# Altium PCB V1.PcbDoc
Units mm, origin at the board's own origin, x right, y up, seen from the top; angles counter-clockwise.
Board outline 147.73 x 85.2 mm, 2 copper layers (Top Layer, Bottom Layer); 129 components, 191 nets, 593 pads, 94 vias.
Unrouted connection lines stored in the file: 2.
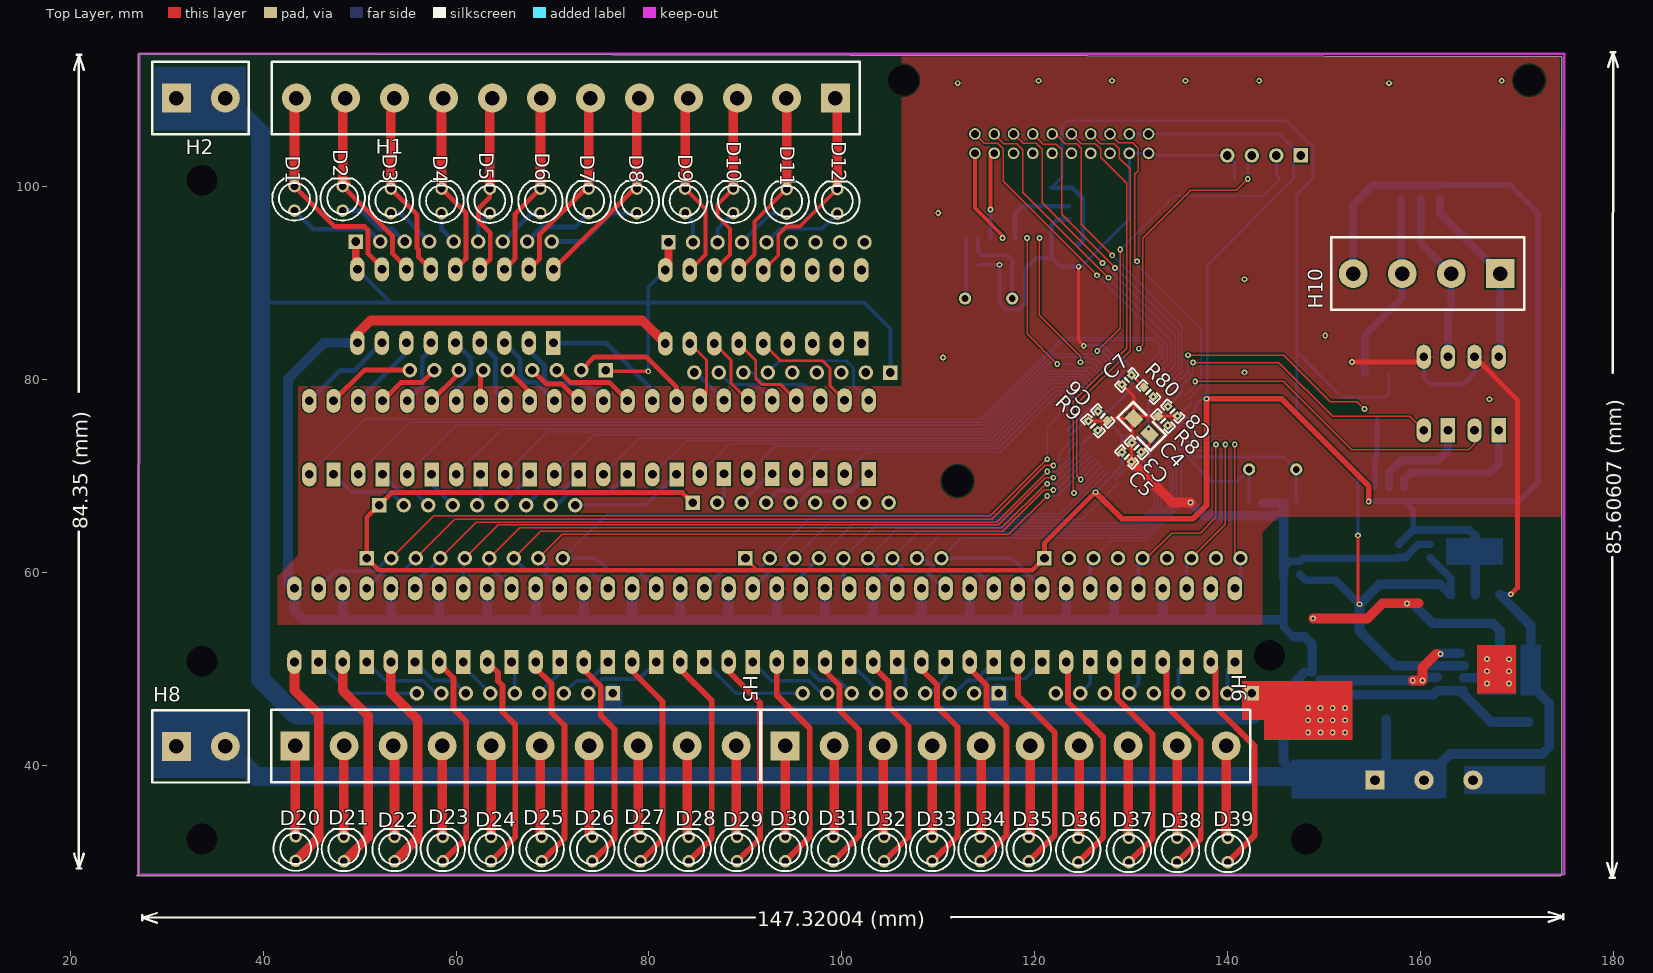
[diagram p0: Top Layer view]
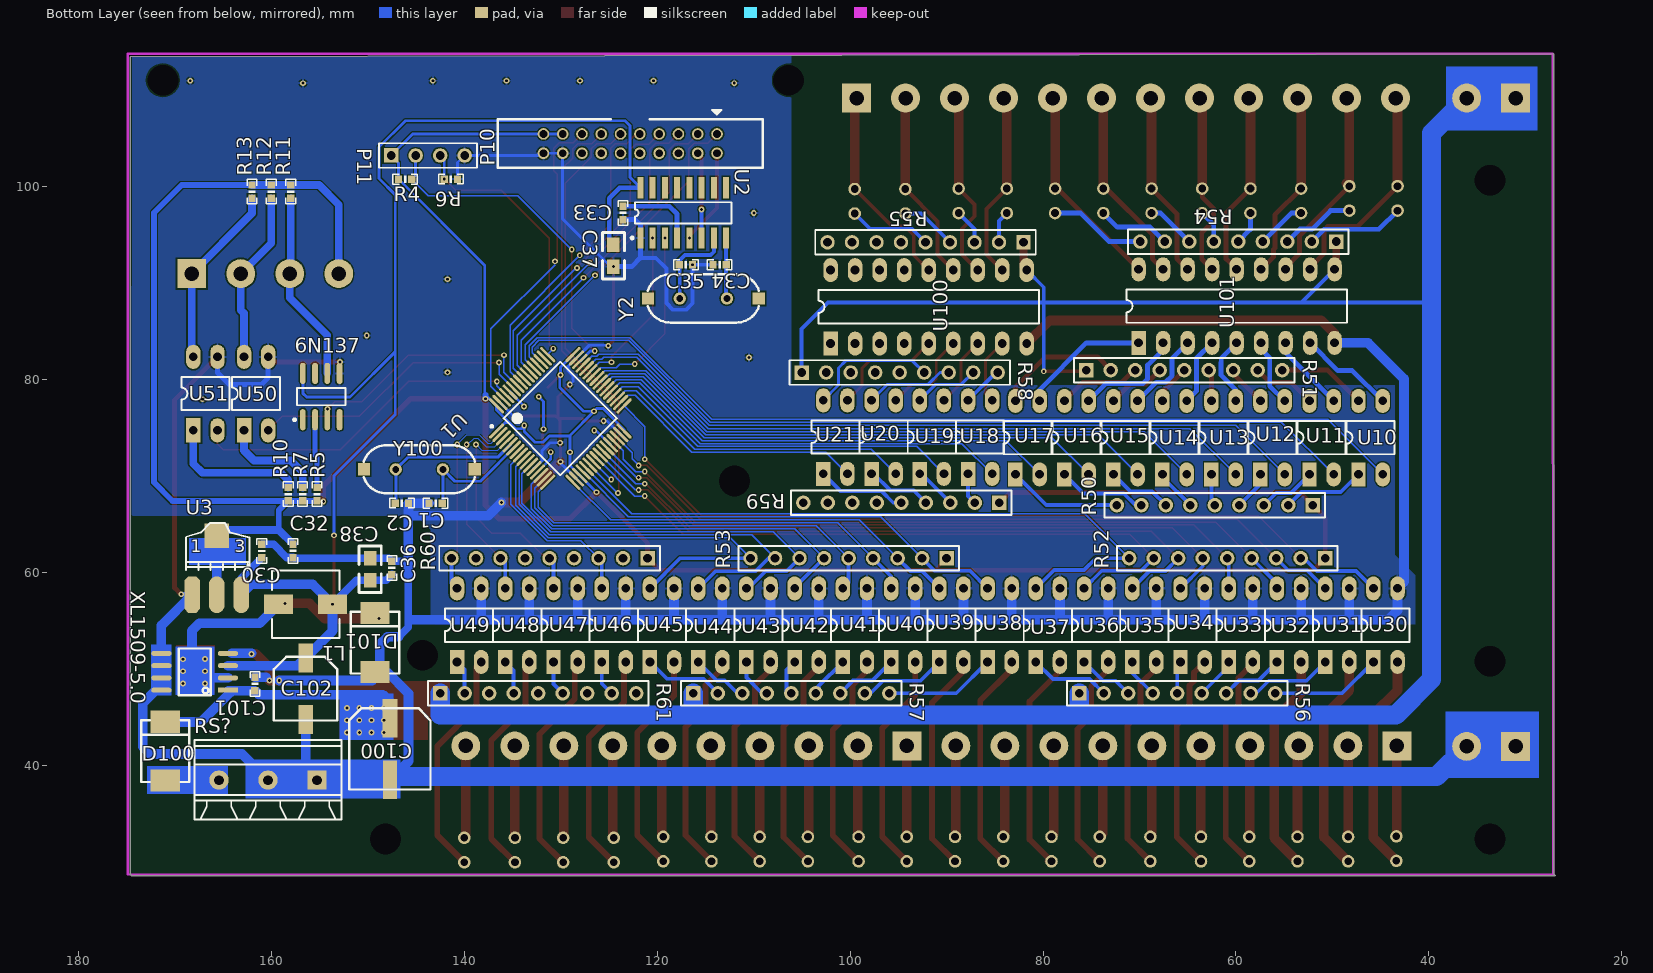
[diagram p1: Bottom Layer view, seen from below]

## Layer stack, top to bottom
Top Layer: signal copper 0.0356
Dielectric: dielectric 0.32, FR-4, Dk 4.8
Bottom Layer: signal copper 0.0356

## Board outline
27.05,113.8 27.05,28.75 26.9,28.6 174.5,28.6 174.625,28.725 174.625,113.5

## Design rules (kind name [scope] priority, off if disabled: settings)
Clearance [All] p1: gap=0.15
PolygonConnect [All] p1: connectstyle=Relief reliefconductorwidth=0.254 reliefentries=4 polygonreliefangle="90 Angle"
RoutingVias [All] p1: holewidth=0.711 width=1.27 viastyle="Through Hole" minholewidth=0.711 minwidth=1.27 maxholewidth=0.711 maxwidth=1.27
SilkscreenOverComponentPads [All] p1: minsilkscreentomaskgap=0.254
SolderMaskExpansion [All] p1: expansion=0.102
Width [All] p1: maxlimit=10 minlimit=0.15 preferedwidth=0.15
27 further rules are at their usual default settings.

## Classes and differential pairs
component class 控制板: C1 C2 C3 C4 C5 C6 C7 C8 C30 C32 C33 C34 C35 C36 C37 C38 C100 C101 C102 D1 D2 D3 D4 D5 D6 D7 D8 D9 D10 D11 D12 D20 D21 D22 D23 D24 D25 D26 D27 D28 D29 D30 D31 D32 D33 D34 D35 D36 D37 D38 D39 D100 D101 H1 H2 H5 H6 H8 H10 L1 P10 P11 R4 R6 R8 R9 R50 R51 R52 R53 R54 R55 R56 R57 R58 R59 R60 R61 R80 RS? U1 U2 U3 U10 U11 U12 U13 U14 U15 U16 U17 U18 U19 U20 U21 U30 U31 U32 U33 U34 U35 U36 U37 U38 U39 U40 U41 U42 U43 U44 U45 U46 U47 U48 U49 U100 U101 XL1509-5.0 Y2 Y100

## Components (designator, comment, footprint, x,y, rotation, side; value= is the part's Value field where it differs from the comment)
6N137 "Comment" SOIC8_N 154.832,78.26 r90 bottom
C1 "22" 0603P 142.966,67.214 r180 bottom
C2 "22" 0603P 146.466,67.214 r0 bottom
C3 "104" 0603P 130.541,72.989 r315 top
C4 "10uF" 0805 130.291,75.989 r315 top
C5 "104" 0603P 129.541,71.989 r135 top
C6 "104" 0603P 127.041,76.239 r135 top
C7 "104" 0603P 129.541,79.989 r45 top
C8 "104" 0603P 133.291,75.739 r315 top
C30 "104" 0603P 161,62.25 r270 bottom
C32 "104" 0603P 157.75,62.25 r90 bottom
C33 "104" 0603P 123.55,97.3 r270 bottom
C34 "22" 0603P 113.525,91.925 r180 bottom
C35 "22" 0603P 117.025,91.925 r0 bottom
C36 "104" 0603P 147.5,60.5 r270 bottom
C37 "10uF" 0805 124.55,91.725 r90 bottom
C38 "10uF" 0805 149.75,61.5 r270 bottom
C100 "Cap Pol1" C-8.4X8.4MM 147.7,41.725 r270 bottom
C101 "104" 0603P 161.7,48.475 r270 bottom
C102 "Cap Pol1" C-6.6X6.6MM 156.45,47.975 r270 bottom
D1 "LED0" LED_A2 43.25,98.8 r270 top
D2 "LED0" LED_A2 48.25,98.8 r270 top
D3 "LED0" LED_A2 53.25,98.55 r270 top
D4 "LED0" LED_A2 58.5,98.55 r270 top
D5 "LED0" LED_A2 63.5,98.55 r270 top
D6 "LED0" LED_A2 68.75,98.55 r270 top
D7 "LED0" LED_A2 73.75,98.55 r270 top
D8 "LED0" LED_A2 78.75,98.55 r270 top
D9 "LED0" LED_A2 83.75,98.55 r270 top
D10 "LED0" LED_A2 88.75,98.55 r270 top
D11 "LED0" LED_A2 94.275,98.5 r270 top
D12 "LED0" LED_A2 99.525,98.5 r270 top
D20 "LED0" LED_A2 43.375,31.4 r270 top
D21 "LED0" LED_A2 48.375,31.35 r270 top
D22 "LED0" LED_A2 53.625,31.35 r270 top
D23 "LED0" LED_A2 58.625,31.35 r270 top
D24 "LED0" LED_A2 63.625,31.35 r270 top
D25 "LED0" LED_A2 68.875,31.35 r270 top
D26 "LED0" LED_A2 74.125,31.35 r270 top
D27 "LED0" LED_A2 79.125,31.35 r270 top
D28 "LED0" LED_A2 84.125,31.35 r270 top
D29 "LED0" LED_A2 89.125,31.35 r270 top
D30 "LED0" LED_A2 94.125,31.35 r270 top
D31 "LED0" LED_A2 99.125,31.35 r270 top
D32 "LED0" LED_A2 104.375,31.35 r270 top
D33 "LED0" LED_A2 109.375,31.35 r270 top
D34 "LED0" LED_A2 114.375,31.35 r270 top
D35 "LED0" LED_A2 119.375,31.35 r270 top
D36 "LED0" LED_A2 124.5,31.25 r270 top
D37 "LED0" LED_A2 129.75,31.25 r270 top
D38 "LED0" LED_A2 134.75,31.25 r270 top
D39 "LED0" LED_A2 140,31.25 r270 top
D100 "1N5822" 6032C-JL 171,41.5 r90 bottom
D101 "1N5822" 6032C-JL 149.25,52.75 r90 bottom
H1 "HEAD12" 5.08dip-12 101.275,109.2 r180 top
H2 "HEAD2" 5.08DIP-2 36,109.2 r0 top
H5 "HEAD10" 5.08dip-10 41.383,42.046 r0 top
H6 "HEAD10" 5.08dip-10 92.183,42.046 r0 top
H8 "HEAD2" 5.08DIP-2 36,42 r0 top
H10 "PWM" 5.08dip-4 170.75,91 r180 top
L1 "Inductor Iron" L-SMT-7X7 156.45,56.725 r0 bottom
P10 "MHDR2X10" HDR10X2_B1_2.0 113.8,105.475 r0 bottom
P11 "Header 4" HDR1X4 147.58,103.25 r180 bottom
R4 "10KR" 0603P 146.13,100.8 r180 bottom
R5 "10KR" 0603P 155.258,68.138 r270 bottom (schematic designator R4)
R6 "10KR" 0603P 141.38,100.8 r0 bottom
R7 "10KR" 0603P 156.758,68.138 r270 bottom (schematic designator R4)
R8 "100K" 0603P 134.291,76.739 r135 top
R9 "100K" 0603P 126.041,75.239 r135 top
R10 "10KR" 0603P 158.258,68.138 r270 bottom (schematic designator R4)
R11 "10KR" 0603P 158,99.5 r270 bottom (schematic designator R4)
R12 "10KR" 0603P 160,99.5 r270 bottom (schematic designator R4)
R13 "10KR" 0603P 162,99.5 r270 bottom (schematic designator R4)
R50 "330" HDR1X9 52.025,67 r0 bottom
R51 "22K" HDR1X9 75.525,81 r180 bottom
R52 "Header 9" HDR1X9 50.75,61.5 r0 bottom
R53 "Header 9" HDR1X9 90,61.5 r0 bottom
R54 "4.7k" HDR1X9 49.6,94.325 r0 bottom
R55 "4.7k" HDR1X9 82.025,94.25 r0 bottom
R56 "4.7k" HDR1X9 76.25,47.5 r180 bottom
R57 "4.7k" HDR1X9 116.25,47.5 r180 bottom
R58 "22K" HDR1X9 105.025,80.75 r180 bottom
R59 "330" HDR1X9 84.525,67.25 r0 bottom
R60 "Header 9" HDR1X9 121,61.5 r0 bottom
R61 "4.7k" HDR1X9 142.5,47.5 r180 bottom
R80 "10R" 0603P 131.791,78.739 r315 top
RS? "Power 24V" MKDSN_3RMI 155.265,38.5 r0 bottom
U1 "STM32F103RBT6" LQFP64 130.041,75.989 r135 bottom
U2 "CH340G" SOP16M 117.3,97.3 r180 bottom
U3 "AMS1117-3.3" AMS1117 168.2,57.725 r180 bottom
U10 "Q817" DIP4 47.299,70.19 r90 bottom
U11 "Q817" DIP4 52.379,70.19 r90 bottom
U12 "Q817" DIP4 57.459,70.19 r90 bottom
U13 "Q817" DIP4 62.539,70.19 r90 bottom
U14 "Q817" DIP4 67.619,70.19 r90 bottom
U15 "Q817" DIP4 72.699,70.19 r90 bottom
U16 "Q817" DIP4 77.779,70.19 r90 bottom
U17 "Q817" DIP4 82.859,70.19 r90 bottom
U18 "Q817" DIP4 87.775,70.25 r90 bottom
U19 "Q817" DIP4 92.775,70.25 r90 bottom
U20 "Q817" DIP4 97.775,70.25 r90 bottom
U21 "Q817" DIP4 102.775,70.25 r90 bottom
U30 "Q817" DIP4 45.75,50.75 r90 bottom
U31 "Q817" DIP4 50.75,50.75 r90 bottom
U32 "Q817" DIP4 55.75,50.75 r90 bottom
U33 "Q817" DIP4 60.75,50.75 r90 bottom
U34 "Q817" DIP4 65.75,50.75 r90 bottom
U35 "Q817" DIP4 70.75,50.75 r90 bottom
U36 "Q817" DIP4 75.75,50.75 r90 bottom
U37 "Q817" DIP4 80.75,50.75 r90 bottom
U38 "Q817" DIP4 85.75,50.75 r90 bottom
U39 "Q817" DIP4 90.75,50.75 r90 bottom
U40 "Q817" DIP4 95.75,50.75 r90 bottom
U41 "Q817" DIP4 100.75,50.75 r90 bottom
U42 "Q817" DIP4 105.75,50.75 r90 bottom
U43 "Q817" DIP4 110.75,50.75 r90 bottom
U44 "Q817" DIP4 115.75,50.75 r90 bottom
U45 "Q817" DIP4 120.75,50.75 r90 bottom
U46 "Q817" DIP4 125.75,50.75 r90 bottom
U47 "Q817" DIP4 130.75,50.75 r90 bottom
U48 "Q817" DIP4 135.75,50.75 r90 bottom
U49 "Q817" DIP4 140.75,50.75 r90 bottom
U50 "Q817" DIP4 162.832,74.76 r90 bottom (schematic designator U42)
U51 "Q817" DIP4 168.082,74.76 r90 bottom (schematic designator U42)
U100 "ULN2803" DIP18 102.025,83.75 r90 bottom
U101 "ULN2803" DIP18 70.1,83.825 r90 bottom
XL1509-5.0 "Component_1" SO8N-W-JL 167.95,49.725 r90 bottom
Y2 "12MHz" XTAL_US 112.775,88.425 r0 bottom
Y100 "8MHz" XTAL_US 142.216,70.714 r0 bottom

## Footprints (in the part's own frame and the unit in brackets; to place one, negate y for a bottom-side part, rotate by r counter-clockwise, add the part's x,y. Pads: shape width x height; smd on the part's side, far side on the other; paste and mask are expansions set on the pad)
5.08DIP-2 [mm]
  rect 3x3 hole 1.5: 1(-5,0)
  round 3 hole 1.5: 2(0.08,0)
  silkscreen extent -7.5,-3.75 2.5,3.75
5.08dip-4 [mm]
  rect 3x3 hole 1.5: 1(2.5,0)
  round 3 hole 1.5: 2(7.58,0) 3(12.66,0) 4(17.74,0)
  silkscreen extent 0,-3.75 20,3.75
5.08dip-10 [mm]
  rect 3x3 hole 1.5: 1(1.94,0)
  round 3 hole 1.5: 2(7.02,0) 3(12.1,0) 4(17.18,0) 5(22.26,0) 6(27.34,0) 7(32.42,0) 8(37.5,0) 9(42.58,0) 10(47.66,0)
  silkscreen extent -0.56,-3.75 50.17,3.75
5.08dip-12 [mm]
  rect 3x3 hole 1.5: 1(1.94,0)
  round 3 hole 1.5: 2(7.02,0) 3(12.1,0) 4(17.18,0) 5(22.26,0) 6(27.34,0) 7(32.42,0) 8(37.5,0) 9(42.58,0) 10(47.66,0) 11(52.74,0) 12(57.82,0)
  silkscreen extent -0.56,-3.75 60.37,3.75
0603P [mil]
  rect 30x30 smd: 1(-27,0) 2(27.5,-0.06)
  silkscreen extent -50,-20 50,20
0805 [mil]
  rect 60x50 smd: 1(0,-0.06) 2(90,-0.06)
  silkscreen extent -50,-45 140,45
6032C-JL [mil]
  rect 90x120 smd: 1(120,0) 2(-120,0)
  silkscreen extent -126,-98 126,98
AMS1117 [mil]
  oct 65x150 smd: 1(0.03,-0.06)
  oval 65x150 smd: 2(100.03,-0.06) 3(200.03,-0.06)
  rect 100x100 smd: 4(100.03,239.94)
  silkscreen extent -26,100 234,293
C-6.6X6.6MM [mm]
  rect 3x1.5 smd: 1(-3.2,0) 2(3.2,0)
  silkscreen extent -3.3,-3.3 3.3,3.3
C-8.4X8.4MM [mm]
  rect 4x1.524 smd: 1(-3.2,0)
  rect 4x1.5 smd: 2(3.2,0)
  silkscreen extent -4.2,-4.2 4.2,4.2
DIP4 [mm]
  rect 2.5x1.5 hole 0.9: 1(0,0)
  oval 2.5x1.5 hole 0.9: 2(0,-2.5) 3(7.62,-2.5) 4(7.62,0)
  silkscreen extent 2.08,-3.75 5.54,1.25
DIP18 [mm]
  rect 2.5x1.5 hole 0.9: 1(0,0)
  oval 2.5x1.5 hole 0.9: 2(0,-2.54) 3(0,-5.08) 4(0,-7.62) 5(0,-10.16) 6(0,-12.7) 7(0,-15.24) 8(0,-17.78) 9(0,-20.32) 10(7.62,-20.32) 11(7.62,-17.78) 12(7.62,-15.24) 13(7.62,-12.7) 14(7.62,-10.16) 15(7.62,-7.62) 16(7.62,-5.08) 17(7.62,-2.54) 18(7.62,0)
  silkscreen extent 2.08,-21.59 5.54,1.27
HDR1X4 [mm] "Connector; Header; 4 Position"
  rect 1.5x1.5 hole 0.9: 1(0,0)
  round 1.5 hole 0.9: 2(2.54,0) 3(5.08,0) 4(7.62,0)
  silkscreen extent -1.27,-1.27 8.89,1.27
HDR1X9 [mm] "Connector; Header; 9 Position"
  rect 1.5x1.5 hole 0.9: 1(0,0)
  round 1.5 hole 0.9: 2(2.54,0) 3(5.08,0) 4(7.62,0) 5(10.16,0) 6(12.7,0) 7(15.24,0) 8(17.78,0) 9(20.32,0)
  silkscreen extent -1.27,-1.27 21.59,1.27
HDR10X2_B1_2.0 [mm]
  round 1.2 hole 0.8: 1(-0.003,-0.008) 2(-0.003,1.992) 3(1.997,-0.008) 4(1.997,1.992) 5(3.997,-0.008) 6(3.997,1.992) 7(5.997,-0.008) 8(5.997,1.992) 9(7.997,-0.008) 10(7.997,1.992) 11(9.997,-0.008) 12(9.997,1.992) 13(11.997,-0.008) 14(11.997,1.992) 15(13.997,-0.008) 16(13.997,1.992) 17(15.997,-0.008) 18(15.997,1.992) 19(17.997,-0.008) 20(17.997,1.992)
  silkscreen extent -4.75,-2.48 22.75,3.49
L-SMT-7X7 [mil]
  rect 118.11x80 smd: 1(-110,0) 2(110,0)
  silkscreen extent -138,-138 138,138
LED_A2 [mm] "直径3MM二极管"
  round 1.3 hole 0.8: 1(1.27,0) 2(-1.27,0)
  silkscreen extent -2.06,-2.3 2.3,2.3
LQFP64 [mm]
  oval 2.1x0.3 smd: 1(-5.6,3.75) 2(-5.6,3.25) 3(-5.6,2.75) 4(-5.6,2.25) 5(-5.6,1.75) 6(-5.6,1.25) 7(-5.6,0.75) 8(-5.6,0.25) 9(-5.6,-0.25) 10(-5.6,-0.75) 11(-5.6,-1.25) 12(-5.6,-1.75) 13(-5.6,-2.25) 14(-5.6,-2.75) 15(-5.6,-3.25) 16(-5.6,-3.75) 33(5.6,-3.75) 34(5.6,-3.25) 35(5.6,-2.75) 36(5.6,-2.25) 37(5.6,-1.75) 38(5.6,-1.25) 39(5.6,-0.75) 40(5.6,-0.25) 41(5.6,0.25) 42(5.6,0.75) 43(5.6,1.25) 44(5.6,1.75) 45(5.6,2.25) 46(5.6,2.75) 47(5.6,3.25) 48(5.6,3.75)
  oval 0.3x2.1 smd: 17(-3.75,-5.6) 18(-3.25,-5.6) 19(-2.75,-5.6) 20(-2.25,-5.6) 21(-1.75,-5.6) 22(-1.25,-5.6) 23(-0.75,-5.6) 24(-0.25,-5.6) 25(0.25,-5.6) 26(0.75,-5.6) 27(1.25,-5.6) 28(1.75,-5.6) 29(2.25,-5.6) 30(2.75,-5.6) 31(3.25,-5.6) 32(3.75,-5.6) 49(3.75,5.6) 50(3.25,5.6) 51(2.75,5.6) 52(2.25,5.6) 53(1.75,5.6) 54(1.25,5.6) 55(0.75,5.6) 56(0.25,5.6) 57(-0.25,5.6) 58(-0.75,5.6) 59(-1.25,5.6) 60(-1.75,5.6) 61(-2.25,5.6) 62(-2.75,5.6) 63(-3.25,5.6) 64(-3.75,5.6)
  silkscreen extent -5.72,-4.15 4.15,4.57
MKDSN_3RMI [mm]
  rect 2x2 hole 1: 1(0,0)
  round 2 hole 1: 2(5.08,0) 3(10.16,0)
  silkscreen extent -2.54,-4.15 12.7,4.11
SO8N-W-JL [mm]
  rect 0.508x2.1 smd: 1(-1.905,-3.45)
  oval 0.508x2.1 smd: 2(-0.635,-3.45) 3(0.635,-3.45) 4(1.905,-3.45) 5(1.905,3.45) 6(0.635,3.45) 7(-0.635,3.45) 8(-1.905,3.45)
  silkscreen extent -2.41,-1.65 2.41,1.65
SOIC8_N [mm] "8-Pin Small Outline Integrated Circuit Package (SOIC8), IPC Medium Density"
  oval 2.2x0.6 smd: 1(-2.4,1.905) 2(-2.4,0.635) 3(-2.4,-0.635) 4(-2.4,-1.905) 5(2.4,-1.905) 6(2.4,-0.635) 7(2.4,0.635) 8(2.4,1.905)
  silkscreen extent -2.52,-2.5 0.9,2.88, body extent -1.95,-2.45 1.95,2.45, height 1.75
SOP16M [mm]
  rect 0.6x2.2 smd: 1(-4.445,-2.6) 2(-3.175,-2.6) 3(-1.905,-2.6) 4(-0.635,-2.6) 5(0.635,-2.6) 6(1.905,-2.6) 7(3.175,-2.6) 8(4.445,-2.6) 9(4.445,2.6) 10(3.175,2.6) 11(1.905,2.6) 12(0.635,2.6) 13(-0.635,2.6) 14(-1.905,2.6) 15(-3.175,2.6) 16(-4.445,2.6)
  silkscreen extent -5.42,-2.72 5,1.1
XTAL_US [mil]
  round 50 hole 28: 1(0,0) 2(192.13,0)
  rect 50x50 smd: ""(-130.32,0) ""(322.44,0)
  silkscreen extent -131,-98 323,98

## Part data
C1 C2 C3 C4 C5 C6 C7 C8 C30 C32 C33 C34 C35 C36 C37 C38 C101: library part C
C100 C102: "Polarized Capacitor (Radial)"
D1 D2 D3 D4 D5 D6 D7 D8 D9 D10 D11 D12 D20 D21 D22 D23 D24 D25 D26 D27 D28 D29 D30 D31 D32 D33 D34 D35 D36 D37 D38 D39: "发光二极管"
D100 D101: library part Diode, "Default Diode"
H10: library part HEAD4
L1: "Magnetic-Core Inductor"
P10: "Header, 10-Pin, Dual row"
P11: "Header, 4-Pin"
R4 R5 R6 R7 R8 R9 R10 R11 R12 R13 R80: library part R
R50 R51 R54 R55 R56 R57 R58 R59 R61: library part "Header 9", "Header, 9-Pin"
R52 R53 R60: "Header, 9-Pin"
RS?: library part HEAD3
U1: "STM32 ARM-based 32-bit MCU with 128 Kbytes Flash, 64-pin LQFP, Industrial Temperature"
U2: "USB2UART"
U3: library part AMS1117
Y2 Y100: library part XTAL, "Crystal Oscillator"

## Free pads (board coordinates)
  round 1.524 hole 3.2: 0(33.68,32.385) 0(33.68,50.825) 0(33.68,100.686) 0(106.375,111.049) 0(111.989,69.494) 0(144.323,51.435) 0(148.184,32.385) 0(171.247,111.049)

## Via types
v1: diameter 0.6, hole 0.3, Top Layer to Bottom Layer, 94 vias

## Nets (pads, with @x,y where several pads share a name; then routed paths per layer and width w, separated by ;. In a path a pad name is that pad's centre, name@x,y a point inside that pad or via, vN(x,y) a via of type N, cw(c..) or ccw(c..) an arc to the next point about the centre after c; other vN are vias at no path point)
B1: P10.3 U1.54 | length 33.4
  Top Layer w0.15: P10.3 116.804,104.475 118.15,104.475 118.775,103.85 118.775,99.425 v1(127.625,90.575)
  Bottom Layer w0.15: v1(127.625,90.575) 134.1,84.1 134.1,81.816 U1.54
B2: P10.1 U1.53 | length 33.7
  Top Layer w0.15: P10.1 114.779,104.5 116.175,104.5 116.75,103.925 116.75,100.575 v1@126.475,90.85
  Bottom Layer w0.15: v1@126.475,90.85 133.675,83.65 133.675,82.098 U1.53
  other v1: 126.45,90.825
BD: P10.15 U1.62 | length 32.7
  Top Layer w0.15: P10.15 128.704,104.575 130.15,104.575 130.725,104 130.725,101.65 130.375,101.3 130.375,92.485 v1(130.581,92.278)
  Bottom Layer w0.15: 130.581,91.944 137.25,85.275 137.25,79.309 U1.62
BL: P10.11 U1.22 | length 46.9
  Top Layer w0.15: P10.11 124.804,104.475 126.275,104.475 126.825,103.925 126.825,103.075 129.515,100.385 129.515,83.29 123.975,77.75 123.975,68.345 v1(124.07,68.25)
  Bottom Layer w0.15: v1(124.07,68.25) 124.105,68.25 126.965,71.11 U1.22
BOOT0: R8.2 U1.60 | length 2.1
  Bottom Layer w0.3: v1(133.798,77.234) 133.798,77.271 U1.60
BR: P10.13 U1.23 | length 43.4
  Top Layer w0.15: v1(124.763,69.65) 124.35,70.063 124.35,77.5 129.875,83.025 129.875,101.85 128.775,102.95 128.775,103.925 128.225,104.475 126.804,104.475 P10.13
  Bottom Layer w0.15: v1(124.763,69.65) U1.23
CH340_D+: P10.2 U2.5 | length 10
  Top Layer w0.4: P10.2 113.797,97.803 116.665,94.935 v1(116.665,94.7)
CH340_D-: P10.4 U2.6 | length 8.9
  Top Layer w0.4: v1(115.395,97.645) 115.395,103.081 P10.4
  Bottom Layer w0.4: U2.6 v1(115.395,97.645)
DIR: H10.2 R12.2 U1.59 U50.2 U50.4 | length 48.1
  Top Layer w0.152: v1(136.398,81.788) 145.288,81.788 150.876,76.2 158.892,76.2 U50.2
  Bottom Layer w0.152: U1.59 136.398,80.578 v1(136.398,81.788)
  Bottom Layer w0.8: R12.2 160.002,94.168 H10.2 163.17,87.224 162.832,86.886 U50.4
DIR_O: 
DIR_VCC: R7.1 U50.1 | length 10.7
  Bottom Layer w0.8: R7.1 156.758,70.398 157.988,71.628 161.798,71.628 162.832,72.662 U50.1
GND: 6N137.5 C1.1 C2.1 C3.1 C4.1 C5.1 C6.1 C7.1 C8.1 C30.1 C32.1 C33.2 C34.1 C35.1 C36.1 C37.1 C38.1 C100.2 C101.1 C102.2 D101.2 H8.1 H8.2 P10.18 P10.20 P11.4 R6.1 R8.1 R9.2 RS?.1 RS?.2 U1.12 U1.18 U1.31 U1.47 U1.63 U2.1 U3.1 U30.3 U31.3 U32.3 U33.3 U34.3 U35.3 U36.3 U37.3 U38.3 U39.3 U40.3 U41.3 U42.3 U43.3 U44.3 U45.3 U46.3 U47.3 U48.3 U49.3 U50.3 U51.3 U100.9 U101.9 XL1509-5.0.4 XL1509-5.0.5 XL1509-5.0.6 XL1509-5.0.7 XL1509-5.0.8 | length 615.3
  Top Layer w0.3: v1(124.548,91.725) 124.548,84.052 125.05,83.55 v1@125.05,83.35 ; v1(125.548,75.734) 127.506,75.734 C6.1 127.759,75.987 C4.1 ; v1(129.056,79.504) 130.289,78.27 C4.1 ; v1(130.026,71.504) 130.026,73.443 v1(130.056,73.474) 130.056,75.754 C4.1 ; v1(134.776,76.254) 134.745,76.224 C8.1 130.526,76.224 C4.1
  Top Layer w0.5: v1(152.883,81.839) U50.3@159.791,81.839 ; U51.3 170.028,77.934 170.028,58.42 v1@169.342,57.734
  Top Layer w1: U101.9 49.78,84.78 51.15,86.15 79.305,86.15 U100.9 ; v1(130.026,71.504) 134.254,67.275 v1(136.15,67.275) ; v1(159.182,48.819) v1(160.198,48.819) 160.198,50.165 161.646,51.613
  Bottom Layer w0.3: U1.31 125.189,75.734 v1(125.548,75.734) ; v1(124.548,91.725) 124.85,91.725 129.797,96.672 P10.18 P10.20 132.029,103.25 P11.4 140.694,102.516 R6.1 ; v1@125.05,83.35 125.275,83.575 127.05,83.575 U1.47 129.25,81.375 129.25,80.9 128.725,80.375 128.725,79.834 v1(129.056,79.504) ; U1.18 130.026,71.377 v1(130.026,71.504) ; v1(130.056,73.474) 131.101,73.474 131.926,72.649 131.926,71.705 ; 131.85,71.704 U1.12 U1.12@132.809,70.791 ; v1(134.776,76.254) 134.902,76.254 U1.63
  Bottom Layer w0.4: C34.1 v1(116.339,91.925) 116.339,87.936 117.025,87.25 118.35,87.25 119.05,87.95 119.05,91.525 120.155,92.63 121.745,92.63 ; RS?.1@155.24,38.525 RS?.1@155.29,38.525
  Bottom Layer w0.5: C33.2 122.3,96.602 121.745,96.047 U2.1 121.745,92.63 122.65,91.725 v1(124.548,91.725) ; U50.3 160.332,80.206 161.036,79.502 164.338,79.502 165.582,80.746 U51.3 ; U3.1@168.235,57.76 v1(169.342,57.76)
  Bottom Layer w0.8: 145.8,59.503 145.8,54.352 146.799,53.353 ; 145.8,60.525 146.461,61.186 C36.1 147.814,61.5 C38.1 157.686,61.5 C32.1 158.389,61.564 159.761,62.936 C30.1
  Bottom Layer w1: 48.25,55.275 U31.3 ; U101.9 46.3,83.825 42.575,80.1 42.575,59.045 U30.3 43.25,56.075 44.2,55.125 145.6,55.125 ; 53.25,55.25 U32.3 ; 58.25,55.175 U33.3 ; 63.25,55.35 U34.3 ; 68.25,55.425 U35.3 ; 73.25,55.225 U36.3 ; 78.25,55.525 U37.3 ; 83.25,55.225 U38.3 ; 88.25,55.15 U39.3 ; 93.25,55.25 U40.3 U40.3@93.475,58.145 ; 98.25,55.425 U41.3 ; 103.25,55.6 U42.3 ; 108.25,55.175 U43.3 ; 113.25,55.175 U44.3 ; 118.25,55.25 U45.3 ; 123.25,55.15 U46.3 ; 128.25,55.275 U47.3 ; 133.25,55.25 U48.3 ; v1(136.15,67.275) 137.525,65.9 145.8,65.9 ; 138.25,55.13 U49.3 ; C1.1 C2.1 ; 145.8,59.503 145.8,60.525 145.8,65.9 ; C2.1@145.8,67.193 C2.1 ; 146.799,53.353 147.968,53.353 148.768,52.553 148.768,49.745 D101.2@148.7,49.677 ; C100.2@147.35,38.875 145.775,40.45 145.775,47.475 D101.2@147.977,49.677 ; D101.2@149.552,48.825 v1@159.182,48.825 ; RS?.1 RS?.1@155.29,38.525 ; 156.45,39.685 C102.2 ; RS?.2 163.045,41.2 172.575,41.2 173.33,41.955 173.33,46.445 171.955,47.82 XL1509-5.0.8 XL1509-5.0.7 XL1509-5.0.6 XL1509-5.0.5 171.4,54.523 U3.1 ; 160.54,49.161 C101.1 ; v1@162.052,51.63 XL1509-5.0.4@164.084,51.63 ; C2.1 145.78,65.92 145.8,65.9
  Bottom Layer w2: H8.2 39.205,38.875 147.35,38.875 154.89,38.875 155.24,38.525 RS?.1
  other v1: 162.052,51.562 167.132,77.978 141.732,80.772 110.49,82.296 125.075,83.525 150.114,84.582 141.732,90.424 109.982,97.282 112.014,110.744 156.718,110.744 120.396,110.998 128.016,110.998 135.636,110.998 143.256,110.998 168.402,110.998
HOFF: H10.1 R13.2 U1.61 U51.2 U51.4 | length 54.5
  Top Layer w0.152: v1(136.627,79.832) 145.745,79.832 152.832,72.746 164.973,72.746 165.582,73.355 U51.2
  Bottom Layer w0.152: U1.61 136.627,79.393 v1(136.627,79.832)
  Bottom Layer w0.8: R13.2 162.002,97.248 H10.1 168.25,82.548 U51.4
HOFF_O: 
HOFF_VCC: R10.1 U51.1 | length 14.8
  Bottom Layer w0.8: R10.1 158.258,69.612 159.004,70.358 167.132,70.358 168.082,71.308 U51.1
I1: R52.2 U1.33 U30.4 | length 87.5
  Top Layer w0.15: R52.2 57.703,65.913 115.372,65.913 121.214,71.755 v1(121.285,71.755)
  Bottom Layer w0.15: v1(121.285,71.755) 121.285,75.153 U1.33
  Bottom Layer w0.4: U30.4 47.555,60.175 51.625,60.175 52.95,61.5 R52.2
I2: R52.3 U1.30 U31.4 | length 80.3
  Top Layer w0.15: R52.3 59.887,65.557 115.529,65.557 121.091,71.12 v1(121.92,71.12)
  Bottom Layer w0.15: R52.3 R52.3@55.83,61.53 ; v1(121.92,71.12) 122.606,71.806 122.606,72.443 U1.30
  Bottom Layer w0.4: U31.4 52.63,60.25 54.58,60.25 R52.3
I3: R52.4 U1.29 U32.4 | length 75.8
  Top Layer w0.15: R52.4 62.118,65.248 116.048,65.248 v1(121.285,70.485)
  Bottom Layer w0.15: v1(121.285,70.485) 122.199,70.485 123.495,71.78 123.495,72.625 U1.29
  Bottom Layer w0.4: U32.4 55.75,58.88 R52.4
I4: R52.5 U1.27 U33.4 | length 72
  Top Layer w0.15: R52.5 64.358,64.948 116.184,64.948 121.087,69.85 v1(121.92,69.85)
  Bottom Layer w0.15: v1(121.92,69.85) 122.134,69.85 U1.27
  Bottom Layer w0.4: U33.4 R52.5@60.75,61.34
I5: R52.6 U1.26 U34.4 | length 70.8
  Top Layer w0.15: R52.6 66.593,64.643 116.594,64.643 121.166,69.215 v1(121.285,69.215)
  Bottom Layer w0.15: v1(121.285,69.215) 122.206,69.215 U1.26
  Bottom Layer w0.4: R52.6 63.45,60.67 U34.4
I6: R52.7 U1.25 U35.4 | length 70.4
  Top Layer w0.15: R52.7 68.777,64.287 116.662,64.287 120.955,68.58 v1(121.92,68.58)
  Bottom Layer w0.15: v1(121.92,68.58) 122.278,68.58 U1.25
  Bottom Layer w0.4: R52.7 67.315,60.175 68.945,60.175 U35.4
I7: R52.8 U1.24 U36.4 | length 70.5
  Top Layer w0.15: R52.8 71.013,63.983 117.323,63.983 v1(121.285,67.945)
  Bottom Layer w0.15: v1(121.285,67.945) 122.315,67.945 126.222,71.852 U1.24
  Bottom Layer w0.4: R52.8@68.545,61.5 69.845,60.2 73.92,60.2 U36.4
I8: R52.9 U1.21 U37.4 | length 74.3
  Bottom Layer w0.08: R52.9 73.36,63.79
  Bottom Layer w0.15: R52.9 75.656,66.086 122.648,66.086 127.318,70.756 U1.21
  Bottom Layer w0.4: R52.9 74.525,61.5 75.75,60.275 78.845,60.275 U37.4
I9: R53.2 U1.20 U38.4 | length 46.9
  Bottom Layer w0.15: R53.2 96.826,65.786 122.985,65.786 127.636,70.438 U1.20
  Bottom Layer w0.4: U38.4 87.58,60.2 91.24,60.2 R53.2
I10: R53.3 U1.17 U39.4 | length 42.5
  Bottom Layer w0.15: R53.3 99.061,65.481 124.836,65.481 U1.17
  Bottom Layer w0.4: U39.4 92.555,60.175 93.755,60.175 R53.3
I11: R53.4 U1.16 U40.4 | length 44.9
  Bottom Layer w0.08: U1.16 132.1,68.626
  Bottom Layer w0.15: R53.4 101.296,65.176 130.725,65.176 132.325,66.777 132.325,68.401 U1.16
  Bottom Layer w0.4: U40.4 95.75,59.63 R53.4
I12: R53.5 U1.15 U41.4 | length 42.3
  Bottom Layer w0.08: U1.15 131.719,69.731 U1.15@132.28,69.17
  Bottom Layer w0.15: R53.5 103.506,64.846 130.819,64.846 132.7,66.727 132.7,68.733 U1.15
  Bottom Layer w0.4: R53.5 100.16,58.96 U41.4
I13: R53.6 U1.14 U42.4 | length 41.5
  Bottom Layer w0.08: U1.14 132.116,70.084 U1.14@132.629,69.571
  Bottom Layer w0.15: R53.6 105.741,64.541 130.938,64.541 133.05,66.653 133.05,69.15 U1.14@132.116,70.084
  Bottom Layer w0.4: R53.6 105.75,58.45 U42.4
I14: R53.7 U1.11 U43.4 | length 42.3
  Bottom Layer w0.15: R53.7 107.969,64.229 131.051,64.229 134.024,67.203 134.024,70.238 U1.11
  Bottom Layer w0.4: R53.7 106.565,60.175 108.75,60.175 110.555,58.37 U43.4
I15: R53.8 U1.10 U44.4 | length 42.9
  Bottom Layer w0.15: U1.10 134.325,70.644
  Bottom Layer w0.152: R53.8 110.208,63.928 131.175,63.928 134.325,67.078 134.325,70.644
  Bottom Layer w0.4: R53.8 108.475,61.5 109.825,60.15 113.97,60.15 U44.4
I16: R53.9 U1.9 U45.4 | length 43.6
  Bottom Layer w0.15: R53.9 112.447,63.627 131.3,63.627 134.675,67.002 134.675,71.001 U1.9
  Bottom Layer w0.4: R53.9 117.62,61.5 U45.4
I17: R60.3 U1.8 U46.4 | length 20.2
  Bottom Layer w0.15: R60.3 127.902,63.322 131.42,63.322 135.2,67.103 135.2,71.183 U1.8
  Bottom Layer w0.4: U46.4 125.75,61.17 R60.3
I18: R60.5 U1.4 U47.4 | length 24.1
  Top Layer w0.15: R60.5 131.579,61.5 134.188,64.11 137.135,64.11 138.775,65.75 v1(138.775,73.3)
  Bottom Layer w0.08: U1.4 136.561,72.65 138.125,72.65 v1(138.775,73.3)
  Bottom Layer w0.4: U47.4 130.75,61.09 R60.5
I19: R60.7 U1.3 U48.4 | length 21.4
  Top Layer w0.08: v1@139.75,73.2 v1(139.75,73.3)
  Top Layer w0.15: R60.7 139.75,65.01 v1(139.75,73.3)
  Bottom Layer w0.08: U1.3 136.893,73.025 137.66,73.025 138.529,73.894 139.021,73.894 v1@139.615,73.3
  Bottom Layer w0.4: U48.4 135.75,61.01 R60.7
I20: R60.9 U1.2 U49.4 | length 21
  Top Layer w0.15: v1(140.725,73.3) 140.725,62.095 R60.9
  Bottom Layer w0.08: U1.2 137.266,73.359 137.522,73.359 138.391,74.228 139.797,74.228 v1(140.725,73.3)
  Bottom Layer w0.4: U49.4 141.32,58.94 R60.9
IN1: D20.2 H5.1 | length 9.4
  Top Layer w1: H5.1 43.323,32.722 D20.2
IN2: D21.2 H5.2 | length 9.4
  Top Layer w1: D21.2 48.375,42.018 H5.2
IN3: D22.2 H5.3 | length 9.5
  Top Layer w1: H5.3 53.625,41.904 D22.2
IN4: D23.2 H5.4 | length 9.5
  Top Layer w1: H5.4 58.563,32.682 D23.2
IN5: D24.2 H5.5 | length 9.4
  Top Layer w1: D24.2 63.643,32.638 H5.5
IN6: D25.2 H5.6 | length 9.5
  Top Layer w1: H5.6 68.723,32.772 D25.2
IN7: D26.2 H5.7 | length 9.6
  Top Layer w1: H5.7 73.803,32.942 D26.2
IN8: D27.2 H5.8 | length 9.5
  Top Layer w1: H5.8 78.883,32.862 D27.2
IN9: D28.2 H5.9 | length 9.5
  Top Layer w1: H5.9 83.963,32.782 D28.2
IN10: D29.2 H5.10 | length 9.5
  Top Layer w1: H5.10 89.043,32.702 D29.2
IN11: D30.2 H6.1 | length 9.4
  Top Layer w1: H6.1 94.123,32.622 D30.2
IN12: D31.2 H6.2 | length 9.5
  Top Layer w1: D31.2 99.203,32.698 H6.2
IN13: D32.2 H6.3 | length 9.5
  Top Layer w1: H6.3 104.283,32.712 D32.2
IN14: D33.2 H6.4 | length 9.4
  Top Layer w1: H6.4 109.363,32.632 D33.2
IN15: D34.2 H6.5 | length 9.5
  Top Layer w1: D34.2 114.443,32.688 H6.5
IN16: D35.2 H6.6 | length 9.5
  Top Layer w1: D35.2 119.523,32.768 H6.6
IN17: D36.2 H6.7 | length 9.6
  Top Layer w1: D36.2 124.603,32.623 H6.7
IN18: D37.2 H6.8 | length 9.6
  Top Layer w1: H6.8 129.683,32.587 D37.2
IN19: D38.2 H6.9 | length 9.5
  Top Layer w1: D38.2 134.763,32.533 H6.9
IN20: D39.2 H6.10 | length 9.6
  Top Layer w1: H6.10 139.843,32.677 D39.2
JTCK/SWCLK/LED2: P11.3 R6.2 U1.49 | length 28.5
  Top Layer w0.15: v1(130.775,83.225) 131.191,83.641 131.191,94.691 136.15,99.65 140.9,99.65 v1(142.075,100.825)
  Bottom Layer w0.15: v1(130.775,83.225) 131.349,82.651 U1.49
  Bottom Layer w0.3: v1(142.075,100.825) 142.075,102.825 P11.3
JTDI/PA15: U1.50
JTDO/PB3: P10.5 U1.55 | length 33.2
  Top Layer w0.15: P10.5 118.779,104.5 120.15,104.5 120.775,103.875 120.775,98.35 v1(127.025,92.1)
  Bottom Layer w0.15: v1(127.025,92.1) 134.5,84.625 134.5,81.509 U1.55
JTMS/SWDIO/LED1: P11.2 R4.2 U1.46 | length 35.7
  Top Layer w0.15: v1(126.475,82.975) 128.854,85.354 v1(128.854,93.497)
  Bottom Layer w0.15: v1(128.854,93.497) 134.442,99.085 143.719,99.085 R4.2
  Bottom Layer w0.3: v1(126.475,82.975) 126.943,82.975 U1.46 ; P11.2 145.04,101.19 R4.2
JTRST/PB4: P10.7 U1.56 | length 32.9
  Top Layer w0.15: P10.7 120.854,104.425 122.225,104.425 122.775,103.875 122.775,97.15 v1(128.325,91.6)
  Bottom Layer w0.15: v1(128.325,91.6) 128.375,91.6 134.9,85.075 134.9,81.202 U1.56
NetC1_2: C1.2 U1.6 Y100.1 | length 14.2
  Bottom Layer w0.3: 135.872,71.925 U1.6 137.867,69.93 137.867,69.911 138.303,69.475 140.977,69.475 Y100.1 142.216,67.264 C1.2
NetC2_2: C2.2 U1.5 Y100.2 | length 17.5
  Bottom Layer w0.3: U1.5@135.954,72.55 U1.5 136.529,71.975 145.834,71.975 Y100.2 147.096,67.284 C2.2
NetC3_2: C3.2 C4.2 R80.2 U1.13 | length 7.2
  Top Layer w0.3: v1(131.033,72.494) 131.906,73.366 C4.2
  Bottom Layer w0.3: v1(131.033,72.494) 131.033,71.814 131.573,71.275 ; v1(131.8,74.875) 131.8,77.76 v1(132.283,78.244)
NetC33_1: C33.1 U2.4 | length 8.4
  Bottom Layer w0.5: U2.4 117.935,97.185 118.736,97.986 C33.1
NetC34_2: C34.2 U2.8 Y2.1 | length 6.2
  Bottom Layer w0.4: Y2.1@112.855,88.505 U2.8
NetC35_2: C35.2 U2.7 Y2.2 | length 9.3
  Bottom Layer w0.4: U2.7 114.125,93.275 114.475,92.925 117.125,92.925 117.724,92.326 C35.2 117.655,91.858 Y2.2
NetD1_1: D1.1 R54.2 | length 10.2
  Bottom Layer w0.5: D1.1 45.18,95.6 50.865,95.6 R54.2
NetD2_1: D2.1 R54.3 | length 7.8
  Bottom Layer w0.5: D2.1 50.195,97.53 52.1,95.625 53.38,95.625 R54.3
NetD3_1: D3.1 R54.4 | length 5.2
  Bottom Layer w0.5: D3.1 54.265,97.28 R54.4
NetD4_1: D4.1 R54.5 | length 3.5
  Bottom Layer w0.5: D4.1 58.5,95.585 R54.5
NetD5_1: D5.1 R54.6 | length 3.5
  Bottom Layer w0.5: R54.6 62.3,96.08 D5.1
NetD6_1: D6.1 R54.7 | length 5.1
  Bottom Layer w0.5: R54.7 67.795,97.28 D6.1
NetD7_1: D7.1 R54.8 | length 7.6
  Bottom Layer w0.5: R54.8 68.88,95.825 72.295,95.825 D7.1
NetD8_1: D8.1 R54.9 | length 10.1
  Bottom Layer w0.5: R54.9 73.15,94.325 76.105,97.28 D8.1
NetD9_1: D9.1 R55.2 | length 3.4
  Bottom Layer w0.4: D9.1 84.565,96.465 R55.2
NetD10_1: D10.1 R55.3 | length 3.7
  Bottom Layer w0.4: R55.3 87.105,95.635 D10.1
NetD11_1: D11.1 R55.4 | length 5.9
  Bottom Layer w0.4: R55.4 92.625,97.23 D11.1
NetD12_1: D12.1 R55.5 | length 8.6
  Bottom Layer w0.4: R55.5 93.585,95.65 97.945,95.65 D12.1
NetD20_1: D20.1 U30.2 | length 23
  Top Layer w0.5: D20.1 D20.1@43.703,30.13
  Top Layer w1: U30.2 43.25,47.8 45.775,45.275 45.775,32.53 D20.1
NetD21_1: D21.1 U31.2 | length 22.8
  Top Layer w1: U31.2 48.25,47.8 50.9,45.15 50.9,32.605 D21.1
NetD22_1: D22.1 U32.2 | length 22.8
  Top Layer w1: U32.2 53.25,47.55 56.05,44.75 56.05,32.505 D22.1
NetD23_1: D23.1 U33.2 | length 22.8
  Top Layer w0.6: U33.2 58.25,50.661 58.25,50.559 59.725,49.084 59.725,45.9 61.05,44.575 61.05,32.505 D23.1
NetD24_1: D24.1 U34.2 | length 22.9
  Top Layer w0.6: U34.2 64.35,49.65 64.35,48.775 64.825,48.3 64.825,45.55 66.15,44.225 66.15,32.605 D24.1
NetD25_1: D25.1 U35.2 | length 22.9
  Top Layer w0.6: U35.2 68.25,50.125 69.9,48.475 69.9,45.5 71.25,44.15 71.25,32.455 D25.1
NetD26_1: D26.1 U36.2 | length 23.4
  Top Layer w0.5: D26.1 D26.1@74.595,30.08
  Top Layer w0.6: U36.2 73.25,49.95 75,48.2 75,45.2 76.425,43.775 76.425,32.38 D26.1
NetD27_1: D27.1 U37.2 | length 23.4
  Top Layer w0.5: D27.1 D27.1@79.62,30.08
  Top Layer w0.6: U37.2 78.25,49.8 81.4,46.65 81.4,32.355 D27.1
NetD28_1: D28.1 U38.2 | length 23
  Top Layer w0.6: U38.2 83.25,50 86.5,46.75 86.5,32.455 D28.1
NetD29_1: D29.1 U39.2 | length 23
  Top Layer w0.6: U39.2 88.25,49.775 91.5,46.525 91.5,32.455 D29.1
NetD30_1: D30.1 U40.2 | length 23.1
  Top Layer w0.6: U40.2 93.25,47.3 96.675,43.875 96.675,32.63 D30.1
NetD31_1: D31.1 U41.2 | length 23.2
  Top Layer w0.6: U41.2 98.25,49.8 99.75,48.3 99.75,45.75 101.8,43.7 101.8,32.755 D31.1
NetD32_1: D32.1 U42.2 | length 23.2
  Top Layer w0.6: U42.2 103.25,50.275 104.825,48.7 104.825,46.125 106.9,44.05 106.9,32.605 D32.1
NetD33_1: D33.1 U43.2 | length 23.3
  Top Layer w0.6: U43.2 108.25,49.975 109.875,48.35 109.875,46.1 111.975,44 111.975,32.68 D33.1
NetD34_1: D34.1 U44.2 | length 23.4
  Top Layer w0.6: U44.2 113.25,50.075 115,48.325 115,46.05 117.075,43.975 117.075,32.78 D34.1
NetD35_1: D35.1 U45.2 | length 23.4
  Top Layer w0.6: U45.2 118.25,47.25 122.075,43.425 122.075,32.78 D35.1
NetD36_1: D36.1 U46.2 | length 23.4
  Top Layer w0.6: U46.2 123.45,50.55 123.45,46.6 127.1,42.95 127.1,32.58 D36.1
NetD37_1: D37.1 U47.2 | length 23.4
  Top Layer w0.6: U47.2 128.55,50.45 128.55,46.9 132.2,43.25 132.2,32.43 D37.1
NetD38_1: D38.1 U48.2 | length 23.4
  Top Layer w0.6: U48.2 133.65,50.35 133.65,46.15 137.2,42.6 137.2,32.43 D38.1
NetD39_1: D39.1 U49.2 | length 23.8
  Top Layer w0.6: U49.2 138.725,50.275 138.725,46.075 142.8,42 142.8,32.78 D39.1
NetD100_1: D100.2 RS?.3 | length 5.8
  Bottom Layer w1: RS?.3 171.127,38.5 D100.2@171.2,38.427
NetD101_2: D101.1 L1.2 XL1509-5.0.2 | length 29.5
  Top Layer w1: v1@148.88,55.245 154.47,55.245 156.05,56.825 159.8,56.825
  Bottom Layer w1: L1.2@159.472,56.497 161.194,54.775 167.444,54.775 168.224,53.995 168.224,49.974 167.34,49.09 XL1509-5.0.2
  other v1: 166.878,48.514 169.164,48.514 166.878,49.784 169.164,49.784 169.164,51.029 166.878,51.054 148.844,55.27 158.575,56.8
NetR9_1: R9.1 U1.28 | length 2.3
  Bottom Layer w0.3: U1.28 126.331,74.754 v1(126.526,74.754)
NetR50_2: R50.2 U10.1 | length 8.6
  Bottom Layer w0.4: U10.1 49.139,68.35 53.215,68.35 R50.2
NetR50_3: R50.3 U11.1 | length 6
  Bottom Layer w0.4: U11.1 54.294,68.275 55.83,68.275 R50.3
NetR50_4: R50.4 U12.1 | length 4.1
  Bottom Layer w0.4: U12.1 57.459,69.186 R50.4
NetR50_5: R50.5 U13.1 | length 3.3
  Bottom Layer w0.4: R50.5 62.539,67.354 U13.1
NetR50_6: R50.6 U14.1 | length 4.4
  Bottom Layer w0.4: R50.6 67.619,69.894 U14.1
NetR50_7: R50.7 U15.1 | length 6.8
  Bottom Layer w0.4: R50.7 68.693,68.428 70.937,68.428 U15.1
NetR50_8: R50.8 U16.1 | length 9.3
  Bottom Layer w0.4: R50.8 70.429,67 71.633,68.204 75.793,68.204 U16.1
NetR50_9: R50.9 U17.1 | length 11.8
  Bottom Layer w0.4: R50.9 79.669,67 U17.1
NetR51_2: R51.2 U17.4 | length 13.2
  Top Layer w0.5: R51.2 74.35,82.365 79.71,82.365 82.859,79.216 U17.4
NetR51_3: R51.3 U16.4 | length 8.7
  Top Layer w0.5: R51.3 70.575,81 71.85,79.725 75.864,79.725 U16.4
NetR51_4: R51.4 U15.4 | length 6.1
  Top Layer w0.5: R51.4 69.33,79.575 70.934,79.575 U15.4
NetR51_5: R51.5 U14.4 | length 4.1
  Top Layer w0.5: R51.5 67.619,78.746 U14.4
NetR51_6: R51.6 U13.4 | length 3.3
  Top Layer w0.5: U13.4 62.539,80.714 R51.6
NetR51_7: R51.7 U12.4 | length 4.4
  Top Layer w0.5: U12.4 60.285,80.636 R51.7
NetR51_8: R51.8 U11.4 | length 6.7
  Top Layer w0.5: U11.4 54.269,79.7 56.445,79.7 R51.8
NetR51_9: R51.9 U10.4 | length 9.2
  Top Layer w0.5: U10.4 50.489,81 R51.9
NetR56_2: R56.2 U37.1 | length 8.4
  Bottom Layer w0.4: R56.2 75.185,48.975 78.975,48.975 U37.1
NetR56_3: R56.3 U36.1 | length 5.9
  Bottom Layer w0.4: R56.3 72.47,48.8 73.8,48.8 U36.1
NetR56_4: R56.4 U35.1 | length 4.1
  Bottom Layer w0.4: R56.4 70.75,49.62 U35.1
NetR56_5: R56.5 U34.1 | length 3.4
  Bottom Layer w0.4: U34.1 66.09,50.41 R56.5
NetR56_6: R56.6 U33.1 | length 4.4
  Bottom Layer w0.4: U33.1 60.75,50.3 R56.6
NetR56_7: R56.7 U32.1 | length 6.6
  Bottom Layer w0.4: U32.1 57.675,48.825 59.685,48.825 R56.7
NetR56_8: R56.8 U31.1 | length 9.1
  Bottom Layer w0.4: U31.1 52.7,48.8 56.6,48.8 57.9,47.5 R56.8
NetR56_9: R56.9 U30.1 | length 11.5
  Bottom Layer w0.4: U30.1 49,47.5 R56.9
NetR57_2: R57.2 U45.1 | length 8.4
  Bottom Layer w0.4: R57.2 115.21,49 119,49 U45.1
NetR57_3: R57.3 U44.1 | length 5.9
  Bottom Layer w0.4: R57.3 111.67,47.5 112.995,48.825 113.825,48.825 U44.1
NetR57_4: R57.4 U43.1 | length 4.4
  Bottom Layer w0.4: R57.4 109.13,47.5 110.75,49.12 U43.1
NetR57_5: R57.5 U42.1 | length 3.7
  Bottom Layer w0.4: U42.1 106.59,49.91 R57.5@106.59,47.5 ; R57.5 106.09,47.515 R57.5@106.125,47.55
NetR57_6: R57.6 U41.1 | length 4.8
  Bottom Layer w0.4: U41.1 103.264,48.236 103.264,47.786 R57.6 ; R57.6@103.775,47.725 104,47.5 R57.6@104.05,47.5
NetR57_7: R57.7 U40.1 | length 6.6
  Bottom Layer w0.4: U40.1 97.675,48.825 99.685,48.825 R57.7
NetR57_8: R57.8 U39.1 | length 9.1
  Bottom Layer w0.4: U39.1 92.7,48.8 96.575,48.8 97.875,47.5 R57.8
NetR57_9: R57.9 U38.1 | length 11.5
  Bottom Layer w0.4: U38.1 89,47.5 R57.9
NetR58_6: R58.6 U21.4 | length 13.7
  Bottom Layer w0.3: R58.6 93.55,81.975 100.45,81.975 101.2,81.225 101.2,79.445 U21.4
NetR58_7: R58.7 U20.4 | length 9.2
  Bottom Layer w0.3: R58.7 90.675,80.75 91.9,79.525 96.12,79.525 U20.4
NetR58_8: R58.8 U19.4 | length 6.7
  Bottom Layer w0.3: R58.8 88.47,79.525 91.12,79.525 U19.4
NetR58_9: R58.9 U18.4 | length 4.3
  Bottom Layer w0.4: R58.9 84.895,80.75 U18.4
NetR59_2: R59.2 U18.1 | length 3.3
  Bottom Layer w0.4: R59.2 87.775,67.96 U18.1
NetR59_3: R59.3 U19.1 | length 4.4
  Bottom Layer w0.4: R59.3 92.605,70.25 U19.1
NetR59_4: R59.4 U20.1 | length 6.9
  Bottom Layer w0.4: R59.4 93.399,68.504 95.829,68.504 97.575,70.25 U20.1
NetR59_5: R59.5 U21.1 | length 9.3
  Bottom Layer w0.4: R59.5 95.525,67.25 96.75,68.475 101,68.475 U21.1
NetR61_2: R61.2 U49.1 | length 3.6
  Bottom Layer w0.4: R61.2 139.96,49.96 U49.1
NetR61_4: R61.4 U48.1 | length 3.6
  Bottom Layer w0.4: R61.4 134.88,49.88 U48.1
NetR61_6: R61.6 U47.1 | length 3.8
  Bottom Layer w0.4: R61.6 130.75,48.45 U47.1 U47.1@130.625,50.75
NetR61_8: R61.8 U46.1 | length 3.7
  Bottom Layer w0.4: R61.8 125.75,48.53 U46.1
NetU10_3: U10.3 U101.8 | length 10
  Bottom Layer w0.5: U10.3 47.939,80.95 49.445,80.95 U101.8
NetU11_3: U11.3 U101.7 | length 8.1
  Bottom Layer w0.5: U11.3 54.86,82.791 U101.7
NetU12_3: U12.3 U101.6 | length 7
  Bottom Layer w0.5: U12.3 56.491,79.342 56.491,82.254 57.4,83.163 U101.6
NetU13_3: U13.3 U101.5 | length 8
  Top Layer w0.5: U101.5 U101.5@60.464,83.301
  Bottom Layer w0.5: U101.5 61.525,82.24 61.525,81.806 61.539,81.792 61.539,80.481 60.039,78.981 U13.3
NetU14_3: U14.3 U101.4 | length 7.7
  Top Layer w0.5: U14.3 U14.3@65.119,78.386
  Bottom Layer w0.5: U101.4 64.1,82.205 64.1,78.829 U14.3
NetU15_3: U15.3 U101.3 | length 8.7
  Bottom Layer w0.5: U101.3 66.619,82.226 66.619,80.431 67.304,79.746 68.263,79.746 U15.3
NetU16_3: U16.3 U101.2 | length 12.4
  Top Layer w0.5: U101.2 U101.2@67.56,84.735
  Bottom Layer w0.5: U101.2 67.56,83.118 69.159,81.519 69.159,80.093 69.627,79.625 73.464,79.625 U16.3
NetU17_3: U17.3 U101.1 | length 13.4
  Bottom Layer w0.5: U101.1 75.5,83.825 80.359,78.966 U17.3
NetU18_3: U18.3 U100.8 | length 6.9
  Top Layer w0.3: U100.8 85.95,82.045 85.95,78.545 U18.3
NetU19_3: U19.3 U100.7 | length 7.3
  Top Layer w0.3: U100.7 88.525,82.01 88.525,79.62 U19.3
NetU20_3: U20.3 U100.6 | length 9.5
  Top Layer w0.3: U100.6 91.075,82 91.075,80.125 91.675,79.525 93.62,79.525 U20.3
NetU21_3: U21.3 U100.5 | length 11.9
  Top Layer w0.3: U100.5 93.64,81.975 98,81.975 98.75,81.225 98.75,79.395 U21.3
O1: U1.52 U10.2 | length 97.1
  Bottom Layer w0.15: U10.2 50.509,75.9 114.356,75.9 122.831,84.375 132.45,84.375 133.275,83.55 133.275,82.405 U1.52
O2: U1.51 U11.2 | length 91
  Bottom Layer w0.15: U11.2 55.289,75.6 114.48,75.6 122.955,84.075 132.275,84.075 132.975,83.375 132.975,82.812 U1.51
O3: U1.45 U12.2 | length 78.3
  Bottom Layer w0.15: U12.2 60.044,75.275 114.579,75.275 121.943,82.638 126.069,82.638 126.258,82.45 126.692,82.45 126.717,82.475 126.736,82.475 U1.45
O4: U1.44 U13.2 | length 72.8
  Bottom Layer w0.15: U13.2 64.774,74.925 114.725,74.925 122.138,82.338 125.554,82.338 125.742,82.15 126.354,82.15 U1.44
O5: U1.41 U14.2 | length 65.9
  Bottom Layer w0.15: U14.2 69.521,74.592 114.842,74.592 121.176,80.925 125.458,80.925 U1.41
O6: U1.40 U15.2 | length 60.4
  Bottom Layer w0.15: U15.2 74.301,74.292 114.967,74.292 121.3,80.625 124.934,80.625 125.787,79.772 U1.40
O7: U1.39 U16.2 | length 54.8
  Bottom Layer w0.15: U16.2 79.081,73.992 115.117,73.992 121.45,80.325 124.644,80.325 U1.39
O8: U1.38 U17.2 | length 49.3
  Bottom Layer w0.15: U17.2 83.861,73.692 115.317,73.692 121.65,80.025 124.237,80.025 U1.38
O9: U1.37 U18.2 | length 43.9
  Bottom Layer w0.15: U18.2 88.417,73.392 115.542,73.392 121.825,79.675 123.879,79.675 U1.37
O10: U1.36 U19.2 | length 38.3
  Bottom Layer w0.15: U19.2 93.117,73.092 115.817,73.092 121.975,79.25 123.597,79.25 U1.36
O11: U1.35 U20.2 | length 32.8
  Bottom Layer w0.15: U20.2 97.817,72.792 116.117,72.792 122.175,78.85 123.29,78.85 U1.35
O12: U1.34 U21.2 | length 27.2
  Bottom Layer w0.15: U21.2 102.517,72.492 116.392,72.492 122.3,78.4 123.033,78.4 U1.34
OUT1: D1.2 H1.12 U101.11 | length 23.4
  Top Layer w0.5: D1.2 47.445,95.875 50.5,95.875 50.886,95.489 50.886,93.071 52.32,91.637 U101.11
  Top Layer w1: D1.2 43.25,108.995 H1.12
OUT2: D2.2 H1.11 U101.12 | length 21
  Top Layer w0.5: D2.2 53.426,94.894 53.426,93.071 54.86,91.637 U101.12
  Top Layer w1: D2.2@48.535,100.355 D2.2 48.25,108.915 H1.11
OUT3: D3.2 H1.10 U101.13 | length 19.6
  Top Layer w0.5: D3.2 55.966,97.104 55.966,93.647 56.125,93.488 56.125,92.72 U101.13
  Top Layer w1: D3.2 53.25,108.835 H1.10
OUT4: D4.2 H1.9 U101.14 | length 19.3
  Top Layer w0.5: D4.2 61.025,97.295 61.025,92.53 U101.14
  Top Layer w1: D4.2 58.5,109.005 H1.9
OUT5: D5.2 H1.8 U101.15 | length 19.3
  Top Layer w0.5: U101.15 63.554,92.519 63.554,95.228 62.346,96.437 62.346,97.758 63.5,98.912 D5.2
  Top Layer w1: D5.2 63.5,108.925 H1.8
OUT6: D6.2 H1.7 U101.16 | length 19.3
  Top Layer w0.5: U101.16 66.125,92.55 66.125,97.195 D6.2
  Top Layer w1: D6.2 68.75,109.095 H1.7
OUT7: D7.2 H1.6 U101.17 | length 20.6
  Top Layer w0.5: U101.17 68.666,92.551 68.666,95.066 73.42,99.82 D7.2
  Top Layer w1: D7.2 73.75,109.015 H1.6
OUT8: D8.2 H1.5 U101.18 | length 21.6
  Top Layer w0.5: U101.18 78.475,99.82 D8.2
  Top Layer w1: D8.2 78.75,108.935 H1.5
OUT9: D9.2 H1.4 U100.11 | length 19.5
  Top Layer w0.4: D9.2 85.875,97.695 85.875,93 U100.11
  Top Layer w1: D9.2 83.75,108.855 H1.4
OUT10: D10.2 H1.3 U100.12 | length 19.9
  Top Layer w0.4: U100.12 88.4,92.985 88.4,95.65 87.1,96.95 87.1,98.17 D10.2
  Top Layer w1: D10.2 88.75,108.775 H1.3
OUT11: D11.2 H1.2 U100.13 | length 19.9
  Top Layer w0.4: U100.13 90.925,92.97 90.925,96.42 D11.2
  Top Layer w1: H1.2 94.275,109.18 D11.2
OUT12: D12.2 H1.1 U100.14 | length 21.9
  Top Layer w0.4: U100.14 93.4,92.905 93.4,95 94.275,95.875 95.63,95.875 D12.2
  Top Layer w1: H1.1 99.525,109.01 D12.2
PA9_RXD: U1.42 U2.3 | length 19.1
  Top Layer w0.15: v1(119.205,94.7) 119.205,84.745 v1(122.325,81.625)
  Bottom Layer w0.15: 124.257,81.229 125.861,81.229 U1.42
  Bottom Layer w0.152: v1(122.325,81.625) 123.861,81.625 124.257,81.229
PA10_TXD: U1.43 U2.2 | length 17.3
  Top Layer w0.15: v1(120.475,94.7) 120.475,86.675 124.746,82.404 124.739,82.398 v1(124.739,81.813)
  Bottom Layer w0.15: v1(124.739,81.813) 125.984,81.813 U1.43
PB5: P10.9 U1.57 | length 32.6
  Top Layer w0.15: P10.9 122.167,105.483 123.175,104.475 124.35,104.475 124.825,104 124.825,96.1 v1(128.025,92.9)
  Bottom Layer w0.15: v1(128.025,92.9) 135.25,85.675 135.25,80.844 U1.57
PB6: 6N137.3 U1.58 | length 24.3
  Top Layer w0.152: v1(135.89,82.55) 145.796,82.55 150.622,77.724 153.416,77.724 v1(154.178,76.962)
  Bottom Layer w0.152: U1.58 135.89,80.777 v1(135.89,82.55)
PWM_O: 6N137.2 R5.1 | length 7.1
  Bottom Layer w0.508: R5.1 155.258,71.946 155.467,72.155 6N137.2
PWMOUT: 6N137.6 H10.3 R11.2 | length 19.7
  Bottom Layer w0.8: 6N137.6 154.197,84.601 158.09,88.494 H10.3 ; H10.3@158.002,91.088 R11.2
RESET: U1.7
VCC3.3: C5.2 C6.2 C7.2 C8.2 C32.2 H10.4 P10.17 P10.19 P11.1 R4.1 R5.2 R7.2 R10.2 R11.1 R12.1 R13.1 R50.1 R52.1 R53.1 R59.1 R60.1 R80.1 U1.1 U1.19 U1.32 U1.48 U1.64 U3.2 U3.4 | length 347.5
  Top Layer w0.3: R53.1 91.251,60.249 ; v1(130.036,80.481) 130.048,80.481 R80.1
  Top Layer w0.4: R59.1@84.525,66.975 R59.1
  Top Layer w0.5: R59.1 83.474,68.301 53.326,68.301 R50.1 50.75,65.725 R52.1 52.001,60.249 91.251,60.249 119.749,60.249 R60.1 121,63.059 v1@126.165,68.224
  Top Layer w0.6: v1(126.278,68.337) 129.032,65.583 136.398,65.583 137.795,66.98 v1(137.795,78.029) 145.567,78.029 154.61,68.986 v1(154.61,67.386)
  Bottom Layer w0.3: U1.32 123.429,74.854 125.575,77 126.282,77 v1(126.548,76.734) ; v1(126.278,68.337) U1.19 129.048,71.107 v1(129.048,72.484) 129.048,74.234 ; U1.48 130.036,81.297 v1(130.036,80.481) 130.1,80.417 130.1,79.2 127.634,76.734 v1(126.548,76.734) ; P10.17 P10.19 145.347,105.483 P11.1 146.816,102.486 R4.1 137.875,91.859 137.875,78.52 137.795,78.44 ; 133.783,74.833 v1(133.783,75.244) ; U1.1 135.783,75.55 135.325,75.55 ; v1@137.59,78.234 U1.64 136.652,76.877 135.325,75.55 ; v1(126.548,76.734) 129.048,74.234 ; 129.048,74.234 129.104,74.178 131.181,74.178 131.842,73.517 132.667,73.517 133.783,74.633 v1(133.783,75.244) ; v1(133.783,75.244) 134.102,74.925 134.7,74.925 135.325,75.55
  Bottom Layer w0.6: v1(137.795,78.029) 137.795,78.44 ; R5.2 R7.2 R10.2 ; 159.225,64.425 159.225,66.474 R10.2 ; R13.1@161.798,100.186 169.283,100.186 172.161,97.307 172.161,69.367 170.233,67.439 R10.2
  Bottom Layer w0.8: H10.4 153.01,98.146 155.05,100.186 R11.1 R12.1 R13.1 ; C32.2 159.225,64.425 165.054,64.425 U3.4
  Bottom Layer w1: U3.2 U3.4
VCC5: 6N137.8 C30.2 C36.2 C37.2 C38.2 C102.1 L1.1 U2.16 U3.3 XL1509-5.0.3 | length 145.3
  Top Layer w0.3: v1@153.5,56.881 v1(153.5,63.875)
  Bottom Layer w0.3: U2.16 122.8,100.955 122.8,106.3 123.35,106.85 146.1,106.85 148.825,104.125 148.825,100.85 147.15,99.175 147.15,82.898 ; v1(153.5,63.875) 153.5,70.05 147.15,76.4 147.15,82.898 ; 6N137.8 156.737,78.607 156.337,78.207 151.841,78.207 147.15,82.898
  Bottom Layer w0.4: C37.2@124.298,94.086 C37.2@124.386,94.173
  Bottom Layer w0.5: U2.16 123.9,99.9 124.975,98.825 124.975,94.438 C37.2
  Bottom Layer w0.8: C36.2 148.089,59.214 C38.2 151.167,59.214 v1(153.656,56.725) ; C30.2 163.119,59.434 U3.3
  Bottom Layer w1: U3.3 162.043,58.8 155.731,58.8 v1(153.656,56.725) 153.656,53.969 C102.1 157.265,50.36 XL1509-5.0.3
VCC24: C100.1 C101.2 D100.1 H2.1 H2.2 R51.1 R54.1 R55.1 R56.1 R57.1 R58.1 R61.1 U100.10 U101.10 XL1509-5.0.1 | length 308
  Top Layer w0.4: R51.1 75.65,80.875 v1(79.925,80.875)
  Top Layer w0.8: R54.1 49.6,91.625 U101.10 ; U100.10 82.025,91.69 R55.1
  Top Layer w2: R61.1 145.296,44.704 v1(148.336,44.704) v1(150.876,44.704) 151.638,44.704
  Bottom Layer w0.4: 39.725,88.15 39.863,88.012 53.212,88.012 ; U101.10 53.212,88.012 ; v1(79.925,80.875) 79.925,87.425 ; 79.925,87.575 79.925,87.925 ; U100.10 79.925,89.59 79.925,88.012 ; R58.1 105.025,85.275 102.288,88.012 79.925,88.012 ; 53.212,88.012 79.838,88.012 ; 79.838,88.012 79.925,87.925 ; 79.838,88.012 79.925,88.012 ; 79.925,87.925 79.925,88.012
  Bottom Layer w1: C100.1 147.7,46.608 148.442,47.35 161.275,47.35 C101.2 164.456,47.776 164.258,47.578 167.313,44.523 D100.1@171.2,44.523
  Bottom Layer w2: H2.2 39.725,105.555 ; 39.725,105.55 39.725,88.15 39.725,48.95 43.425,45.25 76.2,45.25 ; R56.1 76.25,45.3 76.2,45.25 ; 116.25,45.275 R57.1 ; R61.1 142.5,45.25 76.2,45.25
  other v1: 148.336,43.434 149.606,43.434 150.876,43.434 152.146,43.434 149.606,44.704 152.146,44.704 148.336,45.974 149.606,45.974 150.876,45.974 152.146,45.974
pads on no net: 6N137.1 6N137.4 6N137.7 P10.6 P10.8 P10.10 P10.12 P10.14 P10.16 R55.6 R55.7 R55.8 R55.9 R58.2 R58.3 R58.4 R58.5 R59.6 R59.7 R59.8 R59.9 R60.2 R60.4 R60.6 R60.8 R61.3 R61.5 R61.7 R61.9 U2.9 U2.10 U2.11 U2.12 U2.13 U2.14 U2.15 U100.1 U100.2 U100.3 U100.4 U100.15 U100.16 U100.17 U100.18 Y2. Y100.

## Polygon pours and split planes (outlines as drawn)
GND on Bottom Layer "Top Layer-No Net" (solid, remove dead copper): 174.422,113.436 174.269,113.589 106.121,113.589 106.121,79.629 106.578,79.172 106.299,79.451 43.561,79.451 43.561,61.874 41.402,59.715 41.402,54.661 142.995,54.661 143.408,55.074 143.485,55.15 143.485,64.465 144.932,65.913 152.273,65.913 174.422,65.913 174.447,65.938
GND on Top Layer "Top Layer-No Net" (solid, remove dead copper): 174.422,113.259 174.193,113.487 106.223,113.487 106.223,79.4 106.401,79.223 106.299,79.324 43.637,79.324 43.637,61.773 43.612,61.747 41.554,59.69 41.529,59.69 41.529,54.585 143.612,54.585 143.662,54.534 143.586,54.61 143.586,64.211 145.161,65.786 146.71,65.786 174.523,65.786 174.574,65.837

## Keep-outs
Keep-Out Layer:
  lines w0.254: 27.123,28.702 27.178,113.792 ; 27.178,28.71 174.879,28.71 174.879,113.8 27.178,113.8

## Other copper
Top Layer:
  rectangle net VCC24: 141.478,44.704 152.908,48.768
  rectangle net VCC24: 143.764,42.672 152.908,46.99
  rectangle net NetD101_2: 165.862,47.498 169.901,52.527
Bottom Layer:
  rectangle net VCC24: 147.32,42.672 152.908,47.498
  rectangle net VCC3.3: 162.636,60.808 168.554,63.576
  rectangle net NetD101_2: 165.913,47.295 169.926,52.349
  rectangle net VCC24: 28.725,105.825 38.225,112.45
  rectangle net GND: 28.6,38.725 38.3,45.625
  rectangle net GND: 146.6,36.575 162.7,40.625
  rectangle net NetD100_1: 164.5,37.05 172.875,39.95
  rectangle net GND: 170.35,47.287 172.488,52.575

## Silkscreen, mask and mechanical layers (free items; w line width, h text height)
Top Overlay:
  lines w0.254: 20.403,30.857 20.911,29.333 ; 20.403,112.159 20.911,113.683 ; 20.657,29.333 21.165,29.333 ; 20.657,113.683 21.165,113.683 ; 20.911,64.246 20.911,29.333 ; 20.911,78.77 20.911,113.683 ; 21.419,30.857 20.911,29.333 ; 21.419,112.159 20.911,113.683 ; 27.479,23.959 27.479,24.467 ; 29.003,23.706 27.479,24.213 ; 29.003,24.722 27.479,24.213 ; 90.957,24.256 27.479,24.213 ; 111.321,24.27 174.799,24.314 ; 173.275,23.805 174.799,24.314 ; 173.275,24.821 174.799,24.314 ; 174.799,24.06 174.799,24.568 ; 179.337,29.889 179.843,28.365 ; 179.435,112.447 179.945,113.971 ; 179.589,28.365 180.097,28.365 ; 179.691,113.971 180.199,113.971 ; 179.883,61.62 179.843,28.365 ; 179.905,80.715 179.945,113.971 ; 180.353,29.888 179.843,28.365 ; 180.451,112.446 179.945,113.971
  text "84.35 (mm)" at 21.825,64.5 h1.52 r90
  text "85.60607 (mm)" at 180.797,61.873 h1.52 r89.93
  text "147.32004 (mm)" at 91.211,23.342 h1.52 r0.04

## Text inside footprints (layer, text, board x,y; h text height)
U3: Bottom Overlay "1" at 168.352,62.118 h1.27; Bottom Overlay "3" at 163.78,62.118 h1.27